# EAGLE board CT_schematic (EAGLE 7.6.0)

Size 100 x 80 mm. Coordinates in mm from the lower left corner, seen from the top.
Outline: 0,0 100,0 100,80 0,80 0,0
Copper layers (1*16): Top 0.035mm / dielectric 1.5mm / Bottom 0.035mm
Design rules "default": minimum track width 10mil, minimum drill 24mil, track to track 8mil, track to pad 8mil, pad to pad 8mil, via to via 8mil, smd to smd 8mil, copper to edge 40mil, drill to drill 8mil, minimum pad ring 10mil, minimum via ring 8mil, stop-mask expansion 4mil, vias tented up to drill 0mil, thermal gap 10mil

## Footprints (pad centres in the part's own frame; a part is rotated, then mirrored left to right if it is on the bottom)
C0603 = smd 0.8 x 0.8: 1 -0.762,0; 2 0.762,0
C0402 = smd 0.5 x 0.5: 1 -0.508,0; 2 0.508,0
C1206 = smd 1.3 x 1.6: 1 -1.524,0; 2 1.524,0
C1210 = smd 1.2 x 2.5: 1 -1.524,0; 2 1.524,0
EXV-9H = smd 3.505 x 1.676: 1 -2.857,0; 2 2.857,0
L0603 = smd 0.8 x 0.8: 1 -0.762,0; 2 0.762,0
PJ-037B_PACKAGE = drill 3.7 square: 1 12,0 | drill 3.2 square: 2 6,0
R0603 = smd 0.8 x 0.8: 1 -0.762,0; 2 0.762,0
LQFP48 = smd 0.3 x 1.2: 1 -2.75,-4.25; 2 -2.25,-4.25; 3 -1.75,-4.25; 4 -1.25,-4.25; 5 -0.75,-4.25; 6 -0.25,-4.25; 7 0.25,-4.25; 8 0.75,-4.25; 9 1.25,-4.25; 10 1.75,-4.25; 11 2.25,-4.25; 12 2.75,-4.25; 25 2.75,4.25; 26 2.25,4.25; 27 1.75,4.25; 28 1.25,4.25; 29 0.75,4.25; 30 0.25,4.25; 31 -0.25,4.25; 32 -0.75,4.25; 33 -1.25,4.25; 34 -1.75,4.25; 35 -2.25,4.25; 36 -2.75,4.25 | smd 1.2 x 0.3: 13 4.25,-2.75; 14 4.25,-2.25; 15 4.25,-1.75; 16 4.25,-1.25; 17 4.25,-0.75; 18 4.25,-0.25; 19 4.25,0.25; 20 4.25,0.75; 21 4.25,1.25; 22 4.25,1.75; 23 4.25,2.25; 24 4.25,2.75; 37 -4.25,2.75; 38 -4.25,2.25; 39 -4.25,1.75; 40 -4.25,1.25; 41 -4.25,0.75; 42 -4.25,0.25; 43 -4.25,-0.25; 44 -4.25,-0.75; 45 -4.25,-1.25; 46 -4.25,-1.75; 47 -4.25,-2.25; 48 -4.25,-2.75
SOIC-8 = smd 1.6 x 0.6: 1 -2.7,1.905 | smd 1.55 x 0.6: 2 -2.7,0.635; 3 -2.7,-0.635; 4 -2.7,-1.905; 5 2.7,-1.905; 6 2.7,-0.635; 7 2.7,0.635; 8 2.7,1.905
SAMTEC_FTSH-105-01-L-DV-K = smd 0.762 x 2.794: 1 -2.54,-2.032; 2 -2.54,2.032; 3 -1.27,-2.032; 4 -1.27,2.032; 5 0,-2.032; 6 0,2.032; 7 1.27,-2.032; 8 1.27,2.032; 9 2.54,-2.032; 10 2.54,2.032
RFM75-S = smd 0.85 x 1.6: 1 1.7,0.8; 2 2.97,0.8; 3 4.24,0.8; 4 5.51,0.8; 5 6.78,0.8; 6 8.05,0.8; 7 9.32,0.8; 8 10.59,0.8
182-009-MALE = drill 1.194 pad 1.524 octagon: 1 -5.537,10.923; 2 -2.769,10.923; 3 0,10.923; 4 2.769,10.923; 5 5.537,10.923; 6 -4.153,8.08; 7 -1.384,8.08; 8 1.384,8.08; 9 4.153,8.08 | hole 3.048: -12.446,9.501; 12.446,9.501
FCI_10118193-0001LF = smd 0.4 x 1.35: 1 -1.3,2.675; 2 -0.65,2.675; 3 0,2.675; 4 0.65,2.675; 5 1.3,2.675 | smd 1.6 x 1.4: 6 -3.2,2.45; 7 3.2,2.45 | smd 1.9 x 1.9: 8 -1.2,0; 9 1.2,0 | hole 0.5: -3.3,0; 3.3,0
SOT143B = smd 1 x 0.7: 1 -0.75,-1 | smd 0.6 x 0.7: 2 0.95,-1; 3 0.95,1; 4 -0.95,1
ABLS-25.000MHZ-B2F-T = smd 5.6 x 2.8: 1 -3.81,0; 2 5.69,0
ASEK = smd 1.4 x 1: 1 -1.1,-0.8; 2 1.1,-0.8; 3 1.1,0.8; 4 -1.1,0.8
WSON-8 = smd 0.3 x 0.6: 1 -0.75,0; 2 0.05,0; 3 0.85,0; 4 1.65,0; 5 1.65,3.8; 6 0.85,3.8; 7 0.05,3.8; 8 -0.75,3.8 | smd 3 x 2.6: PAD 0.45,1.9
SON-6 = smd 0.55 x 0.3: 1 -0.355,0.5 | smd 0.52 x 0.3: 2 -0.37,0; 3 -0.37,-0.5; 4 0.37,-0.5; 5 0.37,0; 6 0.37,0.5
SW_4-1437565-2 = smd 1.4 x 2.1: 1 -2.23,4.55; 2 -2.23,-4.55; 3 2.23,4.55; 4 2.23,-4.55
LGM67K-G1J2-24-Z = smd 0.8 x 1.4: A -2,0; C 0,0
NC7SZ125M5X = smd 1.3 x 0.7: 1 -1.3,0.95; 2 -1.3,0; 3 -1.3,-0.95; 4 1.3,-0.95; 5 1.3,0.95

## Placement (x,y rotation side)
C1  1e-06  [C0603]  -48.26,73.66 0 top  (outside the outline)
C2  1e-07  [C0603]  -52.07,73.66 0 top  (outside the outline)
C3  1e-07  [C0603]  -55.88,73.66 0 top  (outside the outline)
C4  1e-07  [C0603]  -59.69,73.66 0 top  (outside the outline)
C5  1e-07  [C0603]  -63.5,73.66 0 top  (outside the outline)
C6  1e-07  [C0603]  -67.31,73.66 0 top  (outside the outline)
C7  4.7e-06  [C0603]  -44.45,73.66 0 top  (outside the outline)
C8  1e-08  [C0603]  -71.12,73.66 0 top  (outside the outline)
C9  1e-06  [C0603]  -74.93,73.66 0 top  (outside the outline)
C10  1e-11  [C0402]  -57.15,78.74 0 top  (outside the outline)
C11  1e-11  [C0402]  -60.96,78.74 0 top  (outside the outline)
C12  1e-08  [C0402]  -64.77,78.74 0 top  (outside the outline)
C13  1e-07  [C0402]  -68.58,78.74 0 top  (outside the outline)
C14  1e-08  [C0402]  -72.39,78.74 0 top  (outside the outline)
C15  1e-07  [C0402]  -76.2,78.74 0 top  (outside the outline)
C16  1e-06  [C0603]  -78.74,73.66 0 top  (outside the outline)
C17  1e-07  [C0402]  -80.01,78.74 0 top  (outside the outline)
C18  1e-08  [C0402]  -15.24,83.82 0 top  (outside the outline)
C19  1e-08  [C0402]  -19.05,83.82 0 top  (outside the outline)
C20  1e-05  [C1206]  -66.04,62.23 0 top  (outside the outline)
C21  1e-05  [C1210]  -59.69,62.23 0 top  (outside the outline)
C22  1e-07  [C0402]  -22.86,83.82 0 top  (outside the outline)
C23  0.0001  [EXV-9H]  -68.58,53.34 0 top  (outside the outline)
C24  0.0001  [EXV-9H]  -17.78,62.23 0 top  (outside the outline)
C25  1e-08  [C0402]  -26.67,83.82 0 top  (outside the outline)
C26  1e-08  [C0402]  -30.48,83.82 0 top  (outside the outline)
F1  240.0  [L0603]  -15.24,78.74 0 top  (outside the outline)
J1  PJ-037B  [PJ-037B_PACKAGE]  -57.15,30.48 0 top  (outside the outline)
R1  10000.0  [R0603]  -35.56,68.58 0 top  (outside the outline)
R2  1000.0  [R0603]  -19.05,78.74 0 top  (outside the outline)
R3  1600.5  [R0603]  -22.86,78.74 0 top  (outside the outline)
R4  4700.0  [R0603]  -26.67,78.74 0 top  (outside the outline)
R5  2200.0  [R0603]  -30.48,78.74 0 top  (outside the outline)
R6  2200.0  [R0603]  -34.29,78.74 0 top  (outside the outline)
R7  10000.0  [R0603]  -40.64,68.58 0 top  (outside the outline)
R8  10000.0  [R0603]  -45.72,68.58 0 top  (outside the outline)
R9  10000.0  [R0603]  -50.8,68.58 0 top  (outside the outline)
R10  10000.0  [R0603]  -55.88,68.58 0 top  (outside the outline)
R11  10000.0  [R0603]  -60.96,68.58 0 top  (outside the outline)
R12  10000.0  [R0603]  -66.04,68.58 0 top  (outside the outline)
R13  10000.0  [R0603]  -71.12,68.58 0 top  (outside the outline)
R14  5.0  [R0603]  -38.1,78.74 0 top  (outside the outline)
R15  10000.0  [R0603]  -76.2,68.58 0 top  (outside the outline)
R16  10000.0  [R0603]  -15.24,73.66 0 top  (outside the outline)
R17  10000.0  [R0603]  -20.32,73.66 0 top  (outside the outline)
R18  10000.0  [R0603]  -25.4,73.66 0 top  (outside the outline)
R19  10000.0  [R0603]  -30.48,73.66 0 top  (outside the outline)
R20  120.0  [R0603]  -41.91,78.74 0 top  (outside the outline)
R21  470000.0  [R0603]  -15.24,68.58 0 top  (outside the outline)
R22  100000.0  [R0603]  -20.32,68.58 0 top  (outside the outline)
R23  2231.0  [R0603]  -45.72,78.74 0 top  (outside the outline)
R24  1000.0  [R0603]  -49.53,78.74 0 top  (outside the outline)
R25  10000.0  [R0603]  -35.56,73.66 0 top  (outside the outline)
R26  10000.0  [R0603]  -40.64,73.66 0 top  (outside the outline)
R27  9100.0  [R0603]  -53.34,78.74 0 top  (outside the outline)
R28  680000.0  [R0603]  -25.4,68.58 0 top  (outside the outline)
R29  120000.0  [R0603]  -30.48,68.58 0 top  (outside the outline)
U1  STM32F302CBT6  [LQFP48]  -24.13,44.45 0 top  (outside the outline)
U2  AT25040B-SSHL-T  [SOIC-8]  -40.64,43.18 0 top  (outside the outline)
U3  FTSH-105-01-L-DV-K  [SAMTEC_FTSH-105-01-L-DV-K]  -35.56,31.75 0 top  (outside the outline)
U4  24AA1025T-I/SN  [SOIC-8]  -55.88,43.18 0 top  (outside the outline)
U5  RFM75-S  [RFM75-S]  -26.67,3.81 0 top  (outside the outline)
U6  SN65HVD230D  [SOIC-8]  -69.85,43.18 0 top  (outside the outline)
U7  182-009-113R531  [182-009-MALE]  -50.8,6.35 0 top  (outside the outline)
U8  10118193-0001LF  [FCI_10118193-0001LF]  -38.1,53.34 0 top  (outside the outline)
U9  prtr5v0u2ax  [SOT143B]  -43.18,83.82 0 top  (outside the outline)
U10  ABLS-25.000MHZ-B2F-T  [ABLS-25.000MHZ-B2F-T]  -36.83,62.23 0 top  (outside the outline)
U11  ASEK-32.768KHz-ECST  [ASEK]  -59.69,53.34 0 top  (outside the outline)
U12  LP3878SDX-ADJ/NOPB  [WSON-8]  -30.48,52.07 0 top  (outside the outline)
U13  TPS3895ADRYR  [SON-6]  -46.99,82.55 0 top  (outside the outline)
U14  4-1437565-2  [SW_4-1437565-2]  -73.66,29.21 0 top  (outside the outline)
U15  Q65110A2395  [LGM67K-G1J2-24-Z]  -48.26,62.23 0 top  (outside the outline)
U16  nc7sz125m5x  [NC7SZ125M5X]  -71.12,60.96 0 top  (outside the outline)
U17  nc7sz125m5x  [NC7SZ125M5X]  -77.47,60.96 0 top  (outside the outline)

## Library data of the parts
C1-C26 F1 J1 R1-R29 U1-U17 = circuit_tree

## Nets
CLK_CRYSTAL_U1_5: C10.1 U1.5 U10.1
CLK_CRYSTAL_U1_6: C11.1 U1.6 U10.2
CLK_U1_3: U1.3 U11.3
GND: C1.2 C2.2 C3.2 C4.2 C5.2 C6.2 C7.2 C8.2 C9.2 C10.2 C11.2 C12.2 C13.2 C14.2 C15.2 C16.2 C17.2 C18.2 C19.2 C20.2 C21.2 C22.2 C23.2 C24.2 C25.2 C26.2 J1.2 R2.2 R7.2 R14.2 R21.2 R24.2 R27.2 R29.2 U1.8 U1.23 U1.35 U1.47 U2.4 U3.3 U3.5 U4.4 U5.1 U6.2 U7.5 U8.5 U8.6 U8.7 U8.8 U8.9 U9.1 U11.2 U12.3 U12.PAD U13.2 U15.C U16.2 U16.3 U17.1 U17.3
NET_U1_7: R4.1 U1.7 U17.4
NET_U1_9: C8.1 C9.1 F1.1 U1.9
NET_U1_38: R5.1 U1.38 U4.6
NET_U1_41: R3.1 U1.41 U15.A
NET_U1_42: R1.1 U1.42 U14.3 U14.4
NET_U1_43: R6.1 U1.43 U4.5
NET_U1_44: R7.1 U1.44
NET_U2_3: R8.1 U2.3
NET_U2_7: R10.1 U2.7
NET_U3_9: R14.1 U3.9
NET_U4_1: R16.1 U4.1
NET_U4_2: R17.1 U4.2
NET_U4_3: R15.1 U4.3
NET_U5_3: R18.1 U5.3
NET_U6_6: R20.2 U6.6
NET_U6_8: R21.1 U6.8
NET_U7_2: R20.2 U6.6 U7.2
NET_U7_3: R20.1 U6.7 U7.3
NET_U9_4: U8.1 U9.4
NET_U12_1: C19.1 U12.1
NET_U12_6: R23.2 R24.1 U12.6
NET_U12_8: R22.1 U12.8
NET_U13_1: R26.1 R27.1 U13.1
NET_U13_3: R28.2 R29.1 U13.3
NET_U13_4: R25.1 U13.4 U16.4 U17.2
NET_U14_1: R2.1 U14.1 U14.2
PROC_CAN_RX: U1.45 U6.4
PROC_CAN_TX: U1.46 U6.1
PROC_SPI1_MISO: U1.16 U5.7
PROC_SPI1_MOSI: U1.17 U5.6
PROC_SPI1_NSS: R19.1 U1.14 U5.4
PROC_SPI1_SCK: U1.15 U5.5
PROC_SPI2_MISO: U1.27 U2.2
PROC_SPI2_MOSI: U1.28 U2.5
PROC_SPI2_NSS: R9.1 U1.25 U2.1
PROC_SPI2_SCK: U1.26 U2.6
PROC_SYS_JTCK_SWCLK: R12.1 U1.37 U3.4
PROC_SYS_JTDO_TRACESWO: U1.39 U3.6
PROC_SYS_JTMS_SWDIO: R13.1 U1.34 U3.2
PROC_USB_DM: U1.32 U8.2 U9.3
PROC_USB_DP: U1.33 U8.3 U9.2
RST_OUT_U3_JTAG_RST_B: R11.1 U3.10 U16.1
VCC_S1_11V0: C20.1 C23.1 C24.1 J1.1 R22.2 U12.4
VCC_TIER1_3V3: C1.1 C2.1 C3.1 C4.1 C5.1 C6.1 C7.1 C12.1 C13.1 C14.1 C15.1 C16.1 C17.1 C18.1 C21.1 C22.1 C25.1 C26.1 F1.2 R1.2 R3.2 R4.2 R5.2 R6.2 R8.2 R9.2 R10.2 R11.2 R12.2 R13.2 R15.2 R16.2 R17.2 R18.2 R19.2 R23.1 R25.2 R26.2 R28.1 U1.1 U1.24 U1.36 U1.48 U2.8 U3.1 U4.7 U4.8 U5.2 U6.3 U11.4 U12.5 U13.6 U16.5 U17.5

## Tracks (layer width: path | path; a pad name or v marks a point on that pad's centre or on a via)
CLK_CRYSTAL_U1_5  (2 unrouted)
CLK_CRYSTAL_U1_6  (2 unrouted)
CLK_U1_3  (1 unrouted)
GND  (59 unrouted)
NET_U1_7  (2 unrouted)
NET_U1_9  (3 unrouted)
NET_U1_38  (2 unrouted)
NET_U1_41  (2 unrouted)
NET_U1_42  (3 unrouted)
NET_U1_43  (2 unrouted)
NET_U1_44  (1 unrouted)
NET_U2_3  (1 unrouted)
NET_U2_7  (1 unrouted)
NET_U3_9  (1 unrouted)
NET_U4_1  (1 unrouted)
NET_U4_2  (1 unrouted)
NET_U4_3  (1 unrouted)
NET_U5_3  (1 unrouted)
NET_U6_6  (1 unrouted)
NET_U6_8  (1 unrouted)
NET_U7_2  (2 unrouted)
NET_U7_3  (2 unrouted)
NET_U9_4  (1 unrouted)
NET_U12_1  (1 unrouted)
NET_U12_6  (2 unrouted)
NET_U12_8  (1 unrouted)
NET_U13_1  (2 unrouted)
NET_U13_3  (2 unrouted)
NET_U13_4  (3 unrouted)
NET_U14_1  (2 unrouted)
PROC_CAN_RX  (1 unrouted)
PROC_CAN_TX  (1 unrouted)
PROC_SPI1_MISO  (1 unrouted)
PROC_SPI1_MOSI  (1 unrouted)
PROC_SPI1_NSS  (2 unrouted)
PROC_SPI1_SCK  (1 unrouted)
PROC_SPI2_MISO  (1 unrouted)
PROC_SPI2_MOSI  (1 unrouted)
PROC_SPI2_NSS  (2 unrouted)
PROC_SPI2_SCK  (1 unrouted)
PROC_SYS_JTCK_SWCLK  (2 unrouted)
PROC_SYS_JTDO_TRACESWO  (1 unrouted)
PROC_SYS_JTMS_SWDIO  (2 unrouted)
PROC_USB_DM  (2 unrouted)
PROC_USB_DP  (2 unrouted)
RST_OUT_U3_JTAG_RST_B  (2 unrouted)
VCC_S1_11V0  (5 unrouted)
VCC_TIER1_3V3  (53 unrouted)